# Allegro board SOLAR_21Sept18.brd
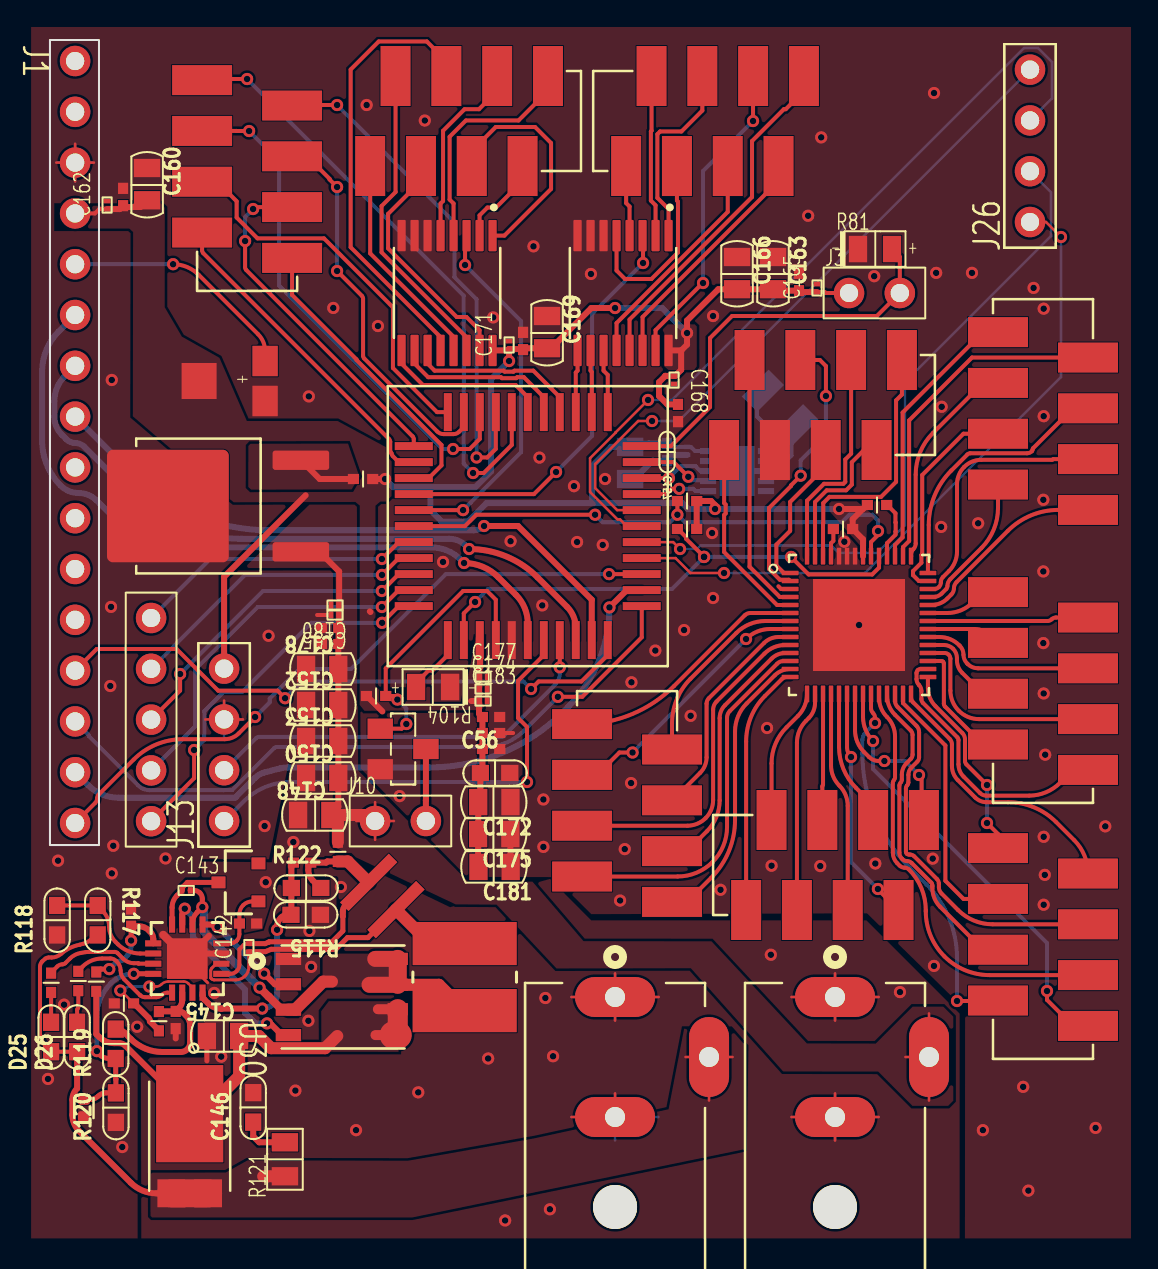
[diagram p0: board, top side]
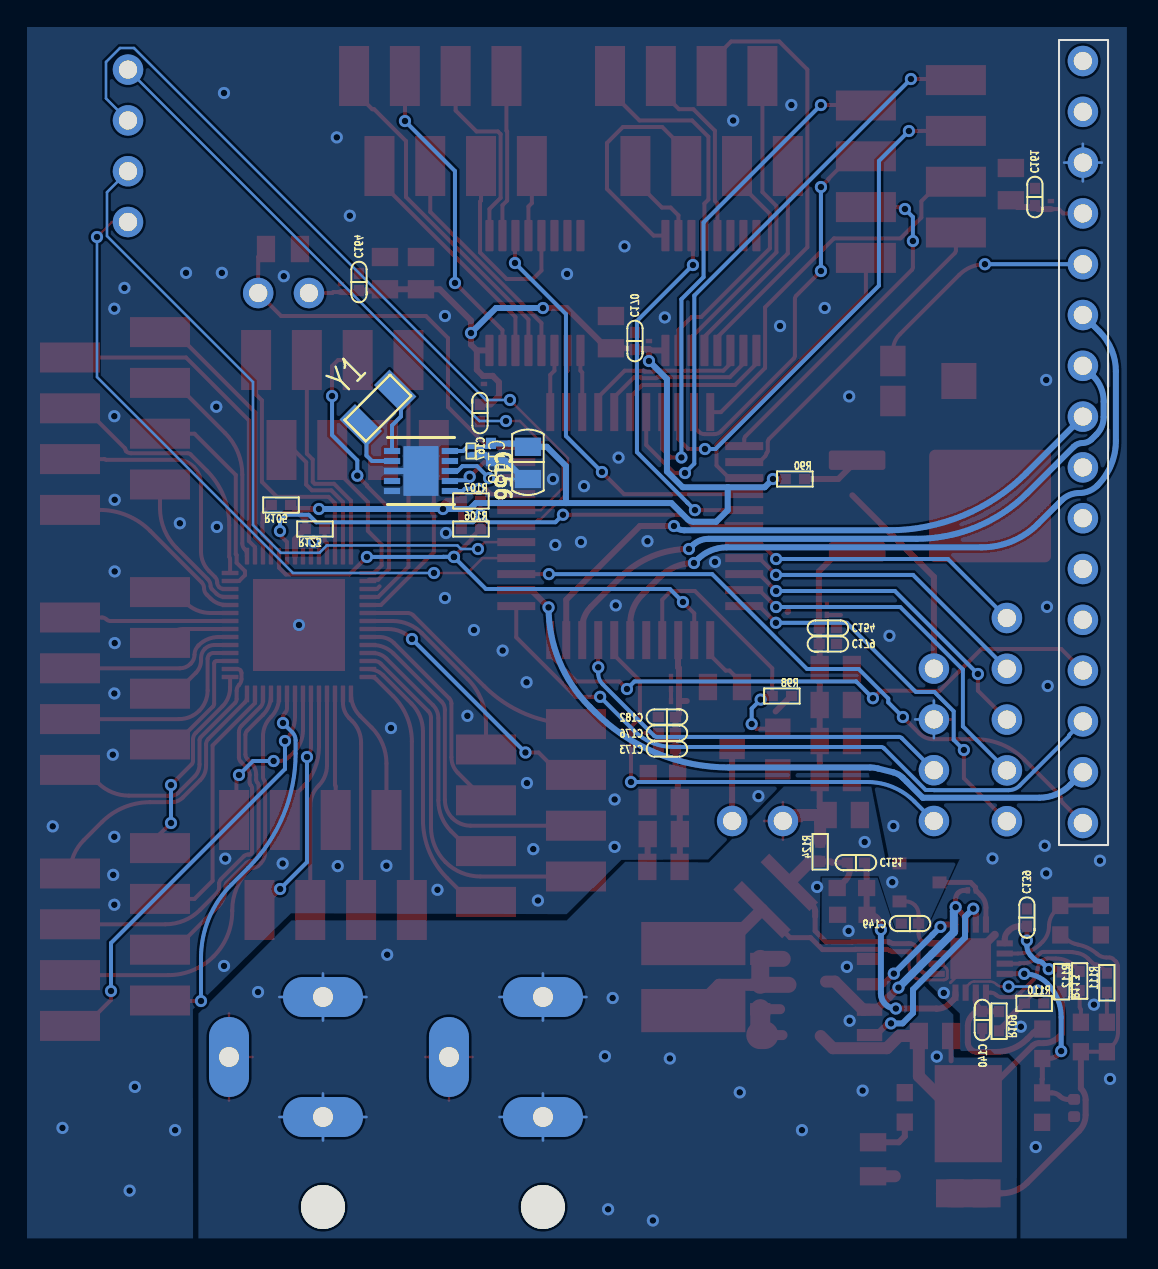
[diagram p1: board, bottom side, seen from below]

Outline 2.45 x 40.25 mm; copper layers: TOP, BOTTOM. Coordinates in mm from the lower left corner of the outline.

## Design rules (mm)
constraint set DEFAULT: min track width 0.127

## Placement (name value [footprint] x y rotation side)
C56  4.7u  [0603G_B]  22.26 3.6 0 top
C139  1u  [0402C_B]  4.06 -3.63 90 top
C140  1u  [0402C_B]  6.29 -8.75 270 top
C142  0.1uF  [0201]  9.95 -5.13 90 top
C143  0.1uF  [0201]  6.81 -2.27 0 top
C145  10u  [0805G]  8.7 -9.55 180 top
C146  2.2uF  [0603G_B]  10.17 -13.12 90 top
C148  4.7uF  [0805G]  13.26 1.5 180 top
C149  1u  [0402C_B]  9.91 -3.92 0 top
C150  10u  [0805G]  13.66 3.35 180 top
C151  4.7uF  [0402C_B]  12.61 -0.88 180 top
C152  10u  [0805G]  13.66 7 180 top
C153  10u  [0805G]  13.66 5.2 180 top
C154  1u  [0402C_B]  14.01 10.85 180 top
C155  0.1uF  [0201]  14.26 11.5 180 top
C156  10u  [0805G]  29.01 19.15 270 bottom
C157  1u  [0402C_B]  30.86 19.65 270 bottom
C158  0.1uF  [0201]  31.86 19.7 270 bottom
C160  10u  [0805G]  4.86 33 90 top
C161  1u  [0402C_B]  3.66 32.4 90 top
C162  0.1uF  [0201]  2.86 32 90 top
C163  10u  [0805G]  36.16 28.55 90 top
C164  1u  [0402C_B]  37.46 28.15 90 top
C165  0.1uF  [0201]  38.36 27.85 90 top
C166  10u  [0805G]  34.36 28.55 90 top
C167  1u  [0402C_B]  31.41 21.6 270 top
C168  0.1uF  [0201]  31.21 23.25 270 top
C169  10u  [0805G]  24.86 25.6 90 top
C170  1u  [0402C_B]  23.66 25.2 90 top
C171  0.1uF  [0201]  22.96 25 90 top
C172  10u  [0805G]  22.18 2.15 0 top
C173  1u  [0402C_B]  22.06 4.8 0 top
C174  0.1uF  [0201]  21.66 7.8 0 top
C175  10u  [0805G]  22.17 0.55 0 top
C176  1u  [0402C_B]  22.06 5.6 0 top
C177  0.1uF  [0201]  21.66 8.4 0 top
C178  10u  [0805G]  13.66 8.8 180 top
C179  1u  [0402C_B]  14.01 10.05 180 top
C180  0.1uF  [0201]  14.26 12 180 top
C181  10u  [0805G]  22.19 -1.09 0 top
C182  1u  [0402C_B]  22.06 6.4 0 top
C183  0.1uF  [0201]  21.66 7.2 0 top
D25  150060GS75000  [0603G_B]  0.06 -9.6 90 top
D26  150060RS75000  [0603G_B]  1.36 -9.6 90 top
D27  BAT54C/SOT  [SOT23-R]  9.43 -1.87 90 top
J1  LCD Conn  [JUMPER16X1]  1.26 39.2 270 top
J2  KEYPAD CONN  [HEADER_8_SMT_254MM]  9.86 33.8 270 top
J3  MagSensor CONN  [JUMPER2]  39.96 27.6 0 top
J6  CON2  [DC_JACK]  40.26 -12.6 270 top
J8  HEADER 8  [HEADER_8_SMT_254MM]  33.26 36.2 180 top
J9  HEADER 5  [JUMPER5]  5.06 11.35 270 top
J10  Fan Conn  [JUMPER2]  16.26 1.2 0 top
J12  HEADER 8  [HEADER_8_SMT_254MM]  20.46 36.2 0 top
J13  HEADER 4  [JUMPER4]  8.71 1.2 90 top
J14  HEADER 8  [HEADER_8_SMT_254MM]  38.16 22 0 top
J15  HEADER 8  [HEADER_8_SMT_254MM]  28.86 1.6 90 top
J16  HEADER 8  [HEADER_8_SMT_254MM]  49.66 21.2 90 top
J17  HEADER 8  [HEADER_8_SMT_254MM]  49.66 8.2 270 top
J18  HEADER 8  [HEADER_8_SMT_254MM]  39.26 -1 180 top
J19  HEADER 8  [HEADER_8_SMT_254MM]  49.66 -4.6 270 top
J24  CON2  [DC_JACK]  29.26 -12.6 270 top
J26  HEADER 4  [JUMPER4]  49.01 31.15 90 top
L1  10uH  [INDM5252X180N]  20.74 -6.6 90 top
Q1  MOSFET N  [SOT23-3A]  17.66 4.8 270 top
Q31  Si7288  [MOSFET_SI7272DP-T1-GE3]  14.66 -7.6 0 top
R80  858-35WR1KLFTR  [VARR]  9.66 23.2 90 top
R81  2.1K  [0805D]  41.26 29.8 0 top
R90  0  [0402R_B]  15.66 18.3 0 top
R98  10K  [0402R_B]  16.31 7.45 0 top
R104  100ohm  [0805D]  19.16 7.9 180 top
R105  1K  [0402R_B]  41.36 17 180 top
R106  1K  [0402R_B]  31.86 15.8 0 top
R107  1K  [0402R_B]  31.86 17.2 0 top
R109  0Ohm  [0402R_B]  5.45 -8.81 90 top
R110  0Ohm  [0402R_B]  3.7 -7.92 0 top
R111  10K  [0402R_B]  0.06 -6.89 270 top
R112  10K  [0402R_B]  1.42 -6.8 270 top
R113  10 Ohm  [0402R_B]  2.32 -6.83 90 top
R115  270k  [0603G_B]  12.79 -3.49 180 top
R116  30 mOhm  [CAPC1632X76N]  16.62 -2.55 315 top
R117  499k  [0603G_B]  2.39 -3.76 270 top
R118  47k  [0603G_B]  0.36 -3.76 90 top
R119  5.23k  [0603G_B]  3.29 -9.94 90 top
R120  30.1k  [0603G_B]  3.3 -13.13 90 top
R121  2 Ohm  [0805R]  11.75 -15.71 90 top
R122  499k  [0603G_B]  12.81 -2.15 0 top
R123  0  [0402R_B]  39.66 15.8 180 top
R124  0Ohm  [0402R_B]  14.4 -0.34 270 top
RT1  THERMISTOR  [CAPC1005X55N]  1.7 -13.15 90 top
U17  PCF85063BTL  [DFN-10_DD]  34.36 18.7 180 bottom
U19  STC15_LQFP44  [LQFP-44]  23.89 15.95 0 top
U20  NCP5501UG  [DPAK229P990X238-3N]  10.41 16.95 90 top
U23  SN74LV4051A-Q1  [SOP65P640X120-16N]  19.86 27.6 270 top
U24  SN74LV4051A-Q1  [SOP65P640X120-16N]  28.66 27.6 270 top
U26  PI4IOE5V96248  [PI4IOE5V96248ZLEX-56N]  40.46 11 0 top
U28  BQ24650  [QFN50P350X350X100-17N]  6.87 -5.68 0 top
U30  PDS1040L  [DIO_SBR10U200P5_13]  6.99 -16.56 270 top
Y1  32.768kHz  [XTAL320X150X90]  36.51 21.85 135 bottom

## Library data of the parts
C56 C139 C140 C145 C149 C150 C152-C154 C156 C157 C160 C161 C163 C164 C166 C167 C169 C170 C172 C173 C175 C176 C178 C179 C181 C182 = CAP
C142 C143 C146 C148 C151 C155 C158 C162 C165 C168 C171 C174 C177 C180 C183 = CAPACITOR NON-POL
D25 D26 = LED
D27 = BAT54C/SOT
J1 = HEADER 16
J2 J8 J12 J14-J19 = HEADER 8
J3 = HEADER 2
J6 J24 = CON2_1
J9 = HEADER 5
J10 = CON2
J13 J26 = HEADER 4
L1 = INDUCTOR
Q1 = MOSFET N_1
Q31 = Si7288_0
R80 = RESISTOR VAR
R81 R104 = RESISTOR
R90 R98 R105-R107 R109-R113 R115-R124 = R
RT1 = THERMISTOR
U17 = PC85063BTL_1
U19 = STC15
U20 = NCP5501UG
U23 U24 = SN74LV4051A-Q1
U26 = PI4IOE5V96248
U28 = BQ24650_3
U30 = PDS1040L_0
Y1 = CRYSTAL

## Footprints (pads in the part's own frame, mm; a bottom-side part is the same pattern mirrored in y, then rotated)
0201
  rect 0.22x0.32 smd: 1(-0.203,0) 2(0.197,0)
0402C_B
  rect 0.559x0.508 smd: 1(-0.432,0) 2(0.432,0)
0402R_B
  rect 0.559x0.508 smd: 1(-0.483,0) 2(0.483,0)
0603G_B
  rect 0.864x0.813 smd: 1(-0.737,0) 2(0.737,0)
0805D
  rect 0.914x1.321 smd: 1(0.85,0) 2(-0.85,0)
0805G
  rect 0.914x1.321 smd: 1(-0.762,0) 2(0.85,0)
0805R
  rect 0.914x1.321 smd: 1(-0.85,0) 2(0.85,0)
CAPC1005X55N
  custom 0.54x0.6 smd: 1(-0.43,0) 2(0.43,0)
CAPC1632X76N
  rect 0.61x3.454 smd: 1(-0.965,0) 2(0.965,0)
DC_JACK
  round 2.2 hole 2.2 unplated: (5.5,-1)
  oval 2x4 hole 1: 1(-5,-1) 2(1,-1)
  oval 4x2 hole 1: 3(-2,3.7)
DFN-10_DD
  rect 0.813x0.305 smd: 1(-1.448,1) 2(-1.448,0.5) 3(-1.448,0) 4(-1.448,-0.5) 5(-1.448,-1) 6(1.448,-1) 7(1.448,-0.5) 8(1.448,0) 9(1.448,0.5) 10(1.448,1)
  rect 1.753x2.489 smd: 11(0,0)
DIO_SBR10U200P5_13
  rect 1.4x1.39 smd: 1(0.856,0.92) 2(0.856,-0.92)
  rect 4.86x3.36 smd: 3(-3.126,0)
DPAK229P990X238-3N
  custom 0.97x2.83 smd: 1(-2.29,-2.14) 3(2.29,-2.14)
  custom 5.63x6.09 smd: 4(0,4.51)
HEADER_8_SMT_254MM
  rect 1.5x3 smd: 1(-4.445,-2.25) 2(-3.175,2.25) 3(-1.905,-2.25) 4(-0.635,2.25) 5(0.635,-2.25) 6(1.905,2.25) 7(3.175,-2.25) 8(4.445,2.25)
INDM5252X180N
  rect 2.159x5.207 smd: 1(-1.676,0) 2(1.676,0)
JUMPER2
  round 1.524 hole 0.914: 1(0,0) 2(2.54,0)
JUMPER4
  round 1.524 hole 0.914: 1(0,0) 2(2.54,0) 3(5.08,0) 4(7.62,0)
JUMPER5
  round 1.524 hole 0.914: 1(0,0) 2(2.54,0) 3(5.08,0) 4(7.62,0) 5(10.16,0)
JUMPER16X1
  round 1.524 hole 0.914: 1(0,0) 2(2.54,0) 3(5.08,0) 4(7.62,0) 5(10.16,0) 6(12.7,0) 7(15.24,0) 8(17.78,0) 9(20.32,0) 10(22.86,0) 11(25.4,0) 12(27.94,0) 13(30.48,0) 14(33.02,0) 15(35.56,0) 16(38.1,0)
LQFP-44
  rect 1.9x0.4 smd: 1(-5.7,4) 2(-5.7,3.2) 3(-5.7,2.4) 4(-5.7,1.6) 5(-5.7,0.8) 6(-5.7,0) 7(-5.7,-0.8) 8(-5.7,-1.6) 9(-5.7,-2.4) 10(-5.7,-3.2) 11(-5.7,-4) 23(5.7,-4) 24(5.7,-3.2) 25(5.7,-2.4) 26(5.7,-1.6) 27(5.7,-0.8) 28(5.7,0) 29(5.7,0.8) 30(5.7,1.6) 31(5.7,2.4) 32(5.7,3.2) 33(5.7,4)
  rect 0.4x1.9 smd: 12(-4,-5.7) 13(-3.2,-5.7) 14(-2.4,-5.7) 15(-1.6,-5.7) 16(-0.8,-5.7) 17(0,-5.7) 18(0.8,-5.7) 19(1.6,-5.7) 20(2.4,-5.7) 21(3.2,-5.7) 22(4,-5.7) 34(4,5.7) 35(3.2,5.7) 36(2.4,5.7) 37(1.6,5.7) 38(0.8,5.7) 39(0,5.7) 40(-0.8,5.7) 41(-1.6,5.7) 42(-2.4,5.7) 43(-3.2,5.7) 44(-4,5.7)
MOSFET_SI7272DP-T1-GE3
  rect 1.27x0.61 smd: 1(-2.732,1.905) 2(-2.732,0.635) 3(-2.732,-0.635) 4(-2.732,-1.905)
  rect 1.02x0.61 smd: 5(2.732,-1.905) 6(2.732,-0.61) 7(2.732,0.61) 8(2.732,1.905)
PI4IOE5V96248ZLEX-56N
  custom 0.84x0.22 smd: 1(-3.445,2.6) 2(-3.445,2.2) 3(-3.445,1.8) 4(-3.445,1.4) 5(-3.445,1) 6(-3.445,0.6) 7(-3.445,0.2) 8(-3.445,-0.2) 9(-3.445,-0.6) 10(-3.445,-1) 11(-3.445,-1.4) 12(-3.445,-1.8) 13(-3.445,-2.2) 14(-3.445,-2.6) 29(3.445,-2.6) 30(3.445,-2.2) 31(3.445,-1.8) 32(3.445,-1.4) 33(3.445,-1) 34(3.445,-0.6) 35(3.445,-0.2) 36(3.445,0.2) 37(3.445,0.6) 38(3.445,1) 39(3.445,1.4) 40(3.445,1.8) 41(3.445,2.2) 42(3.445,2.6)
  custom 0.22x0.84 smd: 15(-2.6,-3.445) 16(-2.2,-3.445) 17(-1.8,-3.445) 18(-1.4,-3.445) 19(-1,-3.445) 20(-0.6,-3.445) 21(-0.2,-3.445) 22(0.2,-3.445) 23(0.6,-3.445) 24(1,-3.445) 25(1.4,-3.445) 26(1.8,-3.445) 27(2.2,-3.445) 28(2.6,-3.445) 43(2.6,3.445) 44(2.2,3.445) 45(1.8,3.445) 46(1.4,3.445) 47(1,3.445) 48(0.6,3.445) 49(0.2,3.445) 50(-0.2,3.445) 51(-0.6,3.445) 52(-1,3.445) 53(-1.4,3.445) 54(-1.8,3.445) 55(-2.2,3.445) 56(-2.6,3.445)
  rect 4.6x4.6 smd: 57(0,0)
QFN50P350X350X100-17N
  rect 0.813x0.305 smd: 1(-1.702,0.762) 2(-1.702,0.254) 3(-1.702,-0.254) 4(-1.702,-0.762) 9(1.702,-0.762) 10(1.702,-0.254) 11(1.702,0.254) 12(1.702,0.762)
  rect 0.305x0.813 smd: 5(-0.762,-1.702) 6(-0.254,-1.702) 7(0.254,-1.702) 8(0.762,-1.702) 13(0.762,1.702) 14(0.254,1.702) 15(-0.254,1.702) 16(-0.762,1.702)
  rect 2.032x2.032 smd: 17(0,0)
SOP65P640X120-16N
  custom 1.57x0.41 smd: 1(-2.87,2.275) 2(-2.87,1.625) 3(-2.87,0.975) 4(-2.87,0.325) 5(-2.87,-0.325) 6(-2.87,-0.975) 7(-2.87,-1.625) 8(-2.87,-2.275) 9(2.87,-2.275) 10(2.87,-1.625) 11(2.87,-0.975) 12(2.87,-0.325) 13(2.87,0.325) 14(2.87,0.975) 15(2.87,1.625) 16(2.87,2.275)
SOT23-3A
  rect 1.016x1.27 smd: 1(-1.016,-1.143) 2(1.016,-1.143) 3(0,1.143)
SOT23-R
  rect 0.6x0.7 smd: 1(-0.95,-1) 2(0.95,-1) 3(0,1)
VARR
  rect 1.524x1.27 smd: 1(-1,-1.1) 2(1,-1.1)
  rect 1.803x1.753 smd: 3(0,2.2)
XTAL320X150X90
  rect 1.092x1.905 smd: 1(-1.219,0) 2(1.219,0)

## Nets
VCC: C56.1 C156.1 C157.1 C158.1 C160.1 C161.1 C162.1 C163.1 C164.1 C165.1 C166.1 C167.1 C168.1 C169.1 C170.1 C171.1 C172.1 C173.1 C174.1 C175.1 C176.1 C177.1 C181.1 C182.1 C183.1 J1.4 J3.1 J13.4 R80.3 R90.2 R98.1 R105.2 R106.2 R107.2 R123.1 U17.10 U19.14 U23.16 U24.16 U26.49
VIN_SOLAR: D25.1 D26.1 J24.3 R117.2 R121.1 U30.1 U30.2
0: C56.2 C139.2 C140.2 C145.2 C146.2 C148.2 C149.2 C150.2 C152.2 C153.2 C154.2 C155.2 C156.2 C157.2 C158.2 C160.2 C161.2 C162.2 C163.2 C164.2 C165.2 C166.2 C167.2 C168.2 C169.2 C170.2 C171.2 C172.2 C173.2 C174.2 C175.2 C176.2 C177.2 C178.2 C179.2 C180.2 C181.2 C182.2 C183.2 J1.3 J6.1 J6.2 J13.3 J14.3 J24.1 J24.2 Q1.2(SOURCE) Q31.1 R80.1 R81.2 R104.2 R110.1 R115.1 R118.1 R120.1 RT1.1 U17.3 U17.5(VSS) U17.11 U19.16 U20.4 U23.6 U23.7 U23.8 U24.6 U24.7 U24.8 U26.50 U26.51 U26.52 U26.57 U28.11 U28.17
ADC0: U19.4 U24.3
ADC0_A: U19.34 U24.11
ADC0_B: U19.35 U24.10
ADC0_C: U19.36 U24.9
ADC0_I0: J8.1 U24.13
ADC0_I1: J8.2 U24.14
ADC0_I2: J8.3 U24.15
ADC0_I3: J8.4 U24.12
ADC0_I4: J8.5 U24.1
ADC0_I5: J8.6 U24.5
ADC0_I6: J8.7 U24.2
ADC0_I7: J8.8 U24.4(Y7)
ADC0_I8: J12.1 U23.13
ADC0_I9: J12.2 U23.14
ADC0_I10: J12.3 U23.15
ADC0_I11: J12.4 U23.12
ADC0_I12: J12.5 U23.1
ADC0_I13: J12.6 U23.5
ADC0_I14: J12.7 U23.2
ADC0_I15: J12.8 U23.4(Y7)
ADC1: U19.5 U23.3
ADC1_A: U19.37 U23.11
ADC1_B: U19.38 U23.10
ADC1_C: U19.39 U23.9
ADC2: J9.1 U19.7
ADC3: J9.2 U19.8
ADC4: J9.3 U19.9
ADC5: J9.4 U19.10
ADC6: J9.5 U19.11(XTAL2/RXD_3/ADC6/P1.6)
FAN+V: J10.2 Q1.3
KP1: J2.1 U19.40
KP2: J2.2 U19.41
KP3: J2.3 U19.42
KP4: J2.4 U19.43
KP5: J2.5 U19.44
KP6: J2.6 U19.1
KP7: J2.7 U19.2
KP8: J2.8 U19.3
LCD_CONTRAST: J1.5 R80.2(WIPER)
LCD_D5: J1.13 U19.22
LCD_D6: J1.14 U19.23
LCD_D7: J1.15 U19.24
LCD_D8: J1.16 U19.25
LCD_EN: J1.8 U19.21
LCD_RS: J1.6 U19.17
LCD_RW: J1.7 U19.20
LD_GRN_CHRG: D25.2(CATHODE) R111.2
LD_RD_CHRG: D26.2(CATHODE) R112.2
P5.5_FANCTRL: Q1.1 R98.2 U19.15
P23_MAGSENSOR: J3.2 R81.1 U19.33
PCF85063BTL_CE: U17.6 U19.30
PCF85063BTL_SCL: U17.7 U19.32
PCF85063BTL_SDIO: U17.8 U19.31
RTC_XTAL1: U17.1 Y1.2
RTC_XTAL2: U17.2 Y1.1
STAT1: R111.1 U28.3
STAT2: R112.1 U28.5
STC_IOEXPDR_SCL: R106.1 U19.13 U26.47
STC_IOEXPDR_SDA: R107.1 U19.6 U26.48
STC_RXD: J13.1 U19.18
STC_TXD: J13.2 U19.19
TEMPERATURE: R104.1 U19.12
V_5V_BEFORE_R: R90.1 U20.3(VOUT)
VMAIN_6V: C148.1 C150.1 C152.1 C153.1 C154.1 C155.1 C178.1 C179.1 C180.1 J6.3 J10.1 R124.1 U20.1
N5281104: R105.1 U26.46
N5281708: J16.1 U26.38
N5281710: J16.2 U26.39
N5281712: J16.3 U26.40
N5281714: J16.4 U26.41
N5281716: J16.5 U26.42
N5281718: J16.6 U26.43
N5281720: J16.7 U26.44
N5281722: J16.8 U26.45(IO5_7)
N5281756: J14.1 U26.5
N5281758: J14.2 U26.4
N5281760: U26.3
N5281762: J14.4 U26.2
N5281764: J14.5 U26.1
N5281766: J14.6 U26.56
N5281768: J14.7 U26.55
N5281770: J14.8 U26.54
N5281960: J15.1 U26.13
N5281966: J15.2 U26.12
N5281972: J15.3 U26.11
N5281978: J15.4 U26.10
N5281984: J15.5 U26.9
N5281990: J15.6 U26.8
N5281996: J15.7 U26.7
N5282002: J15.8 U26.6
N5282607: J17.1 U26.37
N5282609: J17.2 U26.36
N5282611: J17.3 U26.35
N5282613: J17.4 U26.34
N5282615: J17.5 U26.33
N5282617: J17.6 U26.32
N5282619: J17.7 U26.31
N5282621: J17.8 U26.30
N5282705: J18.1 U26.21
N5282707: J18.2 U26.20
N5282709: J18.3 U26.19
N5282711: J18.4 U26.18
N5282713: J18.5 U26.17
N5282715: J18.6 U26.16
N5282717: J18.7 U26.15
N5282719: J18.8 U26.14
N5282803: J19.1 U26.29
N5282805: J19.2 U26.28
N5282807: J19.3 U26.27
N5282809: J19.4 U26.26
N5282811: J19.5 U26.25
N5282813: J19.6 U26.24
N5282815: J19.7 U26.23
N5282817: J19.8 U26.22
N5297541: C140.1 R109.2 R119.2 U28.6(VREF)
N5297885: C143.1 D27.3 U28.16
N5297889: C143.2 L1.1 Q31.3(S2) Q31.7 Q31.8 U28.14
N5298100: R109.1 R110.2 U28.7
N5300450: C149.1 D27.1 U28.12
N5300470: C142.1 L1.2 R116.2 U28.10
N5300474: C142.2 C151.1 R116.1 R122.2 R124.2 U28.9
N5300499: Q31.2 U28.13
N5300503: Q31.4 U28.15
N5300584: C151.2 R115.2 R122.1 U28.8
N5302120: C139.1 R113.2 U28.1
N5302799: C145.1 Q31.5 Q31.6 R113.1 U30.3
N5307205: R117.1 R118.2 U28.2
N5307428: R119.1 R120.2 RT1.2 U28.4
N5310551: C146.1 R121.2
N5327580: R123.2 U26.53
N5329171: J26.1 U19.26
N5329180: J26.2 U19.27
N5329189: J26.3 U19.28
N5329196: J26.4 U19.29

Pads without a net: D27 2; J1 1 2 9 10 11 12; U17 4 9

## Via types
v1: diameter 0.61, hole 0.33, TOP to BOTTOM, 181 vias

## Routing (per net, layer and track width the routed paths; a pad name or vN(x,y) marks a point on that pad's centre or on a via; arc(x,y) is an arc through that point)
VCC: length 104.1
  TOP w0.2: J1.4 2.25,31.58 2.46,31.8 C162.1 ; C165.1 38.75,27.65 38.79,27.6 v1(39.96,27.6)
  TOP w0.3: C181.1 21.41,-1.08 C175.1 21.42,0.56 C172.1 21.52,2.26 C56.1 21.63,3.71 C173.1 C176.1 C182.1 21.46,6.57 C183.1 ; C167.1 30.88,22.03 30.46,22.45 30.46,23.14 30.77,23.46 ; R105.2 40.85,17 40.65,16.8 ; C171.1 22.89,24.73 U23.16 ; C171.1 v1(22.96,24.2) ; C171.1 23.63,24.8 C170.1 23.73,24.84 C169.1 25.06,24.84 27.07,26.85 v1(28.26,26.85) ; C162.1 3.49,31.8 C161.1 3.73,31.9 4.52,31.9 C160.1 ; 21.07,7.2 C183.1 ; C183.1 C174.1 C177.1 21.46,8.84 21.5,8.89 21.5,10.24 21.49,10.25 ; 31.56,24.73 U24.16 ; 31.56,24.73 31.57,24.73 31.86,25.02 v1(31.86,25.6) 31.86,26.23 33.42,27.79 C166.1 C163.1 36.23,27.72 C164.1 37.53,27.65 C165.1 ; 31.56,24.73 31.56,23.76 31.26,23.46 C168.1 31.21,23.46 30.77,23.46 ; 30.77,23.46 30.77,23.47 ; 40.65,16.8 40.14,16.29 R123.1 40.66,15.29 U26.49 ; 40.65,16.8 v1(39.46,16.8) ; 12.79,17.49 8.71,13.41 J13.4 ; v1(33.26,16.8) 33.26,17 33.06,17.2 R107.2 R106.2 ; R98.1 15.85,7.45 16.62,6.68 ; 16.03,11.65 16,11.68 ; R90.2 v1(16.76,18.3)
  BOTTOM w0.2: U17.10 32.25,19.7 32.05,19.91 C158.1 31.04,19.91 C157.1
  BOTTOM w0.3: v1(16.76,18.3) 17.17,17.89 19.02,17.89 ; 27.11,17.1 27.11,18.95 28.07,19.92 C156.1 29.17,20.07 29.95,20.07 29.96,20.08 C157.1 ; 27.11,17.1 31.62,17.1 31.91,16.8 v1(33.26,16.8) v1(39.46,16.8) ; 27.11,17.1 21.83,17.1 21.02,16.28 arc(20.89,16.2) 20.74,16.17 19.6,16.17 19.02,16.74 19.02,17.89 ; 19.02,17.89 21.27,17.89 22.06,18.68 22.06,23.3 v1(22.96,24.2) ; v1(31.86,25.6) 30.61,26.85 v1(28.26,26.85)
VIN_SOLAR: length 26.6
  TOP w0.127: 32.96,-12.77 J24.3 ; J24.3 31.78,-10.6 ; J24.3 34.14,-10.6
  TOP w0.2: D26.1 D25.1 0.06,-10.31 -0.22,-10.03 arc(-0.43,-9.72) -0.5,-9.36 -0.5,-6.09 arc(-0.47,-5.94) -0.39,-5.82 arc(-0.31,-5.75) -0.23,-5.68 arc(-0.16,-5.64) -0.08,-5.62 0.08,-5.62 arc(0.32,-5.58) 0.53,-5.46 0.58,-5.42 arc(1.01,-5.14) 1.49,-4.98 1.65,-4.94 arc(1.89,-4.84) 2.09,-4.69 2.21,-4.57 arc(2.29,-4.51) R117.2
  TOP w0.3: U30.2 5.32,-17.41 arc(4.63,-17.28) 4.04,-16.88 1.46,-14.3 arc(1.21,-13.93) 1.12,-13.49 1.12,-12.74 arc(1.18,-12.43) 1.36,-12.17 D26.1
  TOP w0.6: 10.66,-16.56 R121.1
  TOP w1.4: U30.1 U30.2
0: length 81
  TOP w0.127: 7.77,6.28 J13.3 ; J13.3 8.71,7.22 ; J13.3 9.65,6.28 ; U28.11 8.57,-5.42 ; J6.1 41.44,-7.6 ; J6.1 39.26,-8.77 ; J6.1 37.08,-7.6 ; J6.1 39.26,-6.42 ; J6.2 41.44,-13.6 ; J6.2 37.08,-13.6 ; J6.2 39.26,-12.42 ; J6.2 39.26,-14.77 ; J24.1 28.26,-6.42 ; J24.1 28.26,-8.77 ; J24.1 26.08,-7.6 ; J24.1 30.44,-7.6 ; 26.08,-13.6 J24.2 28.26,-12.42 ; 0.32,34.12 J1.3 ; J1.3 1.26,35.06 ; J1.3 1.26,33.18 ; J1.3 2.2,34.12
  TOP w0.15: U28.17 6.87,-5.86 7.88,-6.88
  TOP w0.2: C155.2 13.36,11.5 ; C176.2 23.16,5.6 ; C174.2 C183.2
  TOP w0.25: C145.2 7.85,-10.79
  TOP w0.3: C181.2 23.02,-1.08 C175.2 ; U28.17 6.87,-5.62 7.96,-4.53 ; U28.11 7.15,-5.42 6.9,-5.68 ; C140.2 6.29,-9.67
  TOP w0.4: 6.9,-5.68 U28.17 6.86,-5.68 5.66,-4.48
  BOTTOM w0.127: J24.1 30.44,-7.6 ; J24.1 28.26,-8.77 ; J24.1 26.08,-7.6 ; J24.1 28.26,-6.42 ; 1.26,33.18 J1.3 ; J1.3 2.2,34.12 ; J1.3 1.26,35.06 ; J1.3 0.32,34.12 ; 26.08,-13.6 J24.2 ; J24.2 30.44,-13.6 ; J24.2 28.26,-14.77 ; J24.2 28.26,-12.42 ; 37.08,-7.6 J6.1 ; J6.1 39.26,-8.77 ; J6.1 41.44,-7.6 ; J6.1 39.26,-6.42 ; 39.26,-14.77 J6.2 ; J6.2 41.44,-13.6 ; J6.2 37.08,-13.6 ; J6.2 39.26,-12.42 ; 8.71,5.34 J13.3 ; J13.3 9.65,6.28 ; J13.3 8.71,7.22 ; 29.85,18.3 29.21,18.3
  BOTTOM w0.3: U17.3 U17.11 ; C156.2 29.21,18.3 30.13,19.22 C157.2 31.14,19.51 C158.2
  vias: v1(-0.1,-11.69) v1(0.41,-0.78) v1(0.71,-7.98) v1(3.09,23.26) v1(3.06,11.91) v1(3.02,7.95) v1(3.09,-1.42) v1(3.17,-0.03) v1(3.62,-15.1) v1(4.36,-9.08) v1(5.78,-0.67) v1(8.22,-7.39) v1(8.57,-10.58) v1(10.74,0.95) v1(10.79,-1.86) v1(10.93,10.46) v1(12.17,0.15) v1(12.27,-12.28) v1(12.95,22.43) v1(12.98,-4.29) v1(12.92,-8.78) v1(13.06,-6.09) v1(14.17,26.86) v1(14.55,-2.1) v1(15.31,-14.25) v1(15.84,37) v1(16.4,25.95) v1(17.49,2.45) v1(18.42,-12.36) v1(18.75,36.23) v1(19.66,14.16) v1(21.91,-10.67) v1(22.17,26.38) v1(22.76,-18.77) v1(23.03,15.19) v1(24.18,29.94) v1(24.48,19.37) v1(24.62,11.98) v1(24.68,2.28) v1(24.68,-0.09) v1(24.77,-7.65) v1(25,-18.21) v1(25.16,-10.56) v1(26.21,17.95) v1(26.36,15.15) v1(27.05,28.56) v1(27.64,15.01) v1(27.76,18.3) v1(28.51,-2.77) v1(28.74,-0.2) v1(29.08,8.14) v1(29.06,3.1) v1(30.27,9.73) v1(31.71,10.75) v1(32.04,6.46) v1(33.16,26.45) v1(33.11,15.6) v1(33.16,12.35) v1(33.53,-2.24) v1(35.86,5.85) v1(36.09,-1.03) v1(36.05,-5.48) v1(37.92,31.47) v1(38.57,35.39) v1(38.52,-1.05) v1(39.73,15.17) v1(40.46,11) v1(41.22,28.44) v1(41.27,-0.92) v1(42.51,-7.35) v1(44.14,-0.68) v1(44.21,-6.04) v1(44.21,37.6) v1(44.32,28.61) v1(44.59,21.92) v1(44.57,15.91) v1(46.11,28.61) v1(46.42,16.09) v1(46.65,-14.25) v1(48.67,-12.09) v1(48.93,-17.28) v1(49.19,27.86) v1(49.69,26.82) v1(49.69,21.44) v1(49.68,17.26) v1(49.68,13.68) v1(49.68,10.1) v1(49.69,7.58) v1(49.69,0.41) v1(49.69,-2.98) v1(49.77,4.52) v1(49.75,-1.49) v1(52.29,-14.14) v1(52.77,0.94)
ADC0: length 21.2
  TOP w0.2: v1(25.31,18.65) 24.2,17.55 U19.4 ; U24.3 29.66,30.45 v1(29.66,29.1)
  BOTTOM w0.2: v1(25.31,18.65) 27.11,20.45 27.11,26.55 v1(29.66,29.1)
ADC0_A: length 3.2
  TOP w0.2: U24.11 27.68,23.72 27.89,23.51 U19.34
ADC0_B: length 3.1
  TOP w0.2: U24.10 27.03,23.72 27.09,23.66 U19.35
ADC0_C: length 3.1
  TOP w0.2: U24.9 26.38,23.72 26.29,23.63 U19.36
ADC0_I0: length 17.4
  TOP w0.2: U24.13 28.98,26.28 35.11,32.4 35.11,35.2 36.7,36.79 36.79,36.79 37.7,37.7 J8.1
ADC0_I1: length 12
  TOP w0.2: U24.14 29.63,26.4 36.43,33.2 J8.2
ADC0_I2: length 15.8
  TOP w0.2: J8.3 35.16,38.45 v1(35.16,36.2) ; U24.15 30.28,25.75 32.66,28.12 v1(32.66,28.1)
  BOTTOM w0.2: v1(35.16,36.2) 32.66,33.7 v1(32.66,28.1)
ADC0_I3: length 11.5
  TOP w0.2: 33.89,33.95 33.89,31.66 28.33,26.1 U24.12
ADC0_I4: length 9.8
  TOP w0.2: U24.1 30.93,31.8 30.38,32.36 30.38,35.55 30.51,35.68 31.58,35.68 32.62,36.73 J8.5
ADC0_I5: length 9.9
  TOP w0.2: U24.5 28.33,28.73 28.76,28.3 30.08,28.3 31.41,29.63 31.41,32.18 31.35,32.23 J8.6
ADC0_I6: length 8.1
  TOP w0.2: U24.2 30.28,31.99 30.05,32.22 30.05,35.68 30.08,35.72 J8.7
ADC0_I7: length 3.6
  TOP w0.2: U24.4 28.98,31.93 28.81,32.1 J8.8
ADC0_I8: length 10.9
  TOP w0.2: J12.1 16.01,29.59 20.18,25.42 U23.13
ADC0_I9: length 15.8
  TOP w0.2: J12.2 17.28,32.65 16.58,31.95 16.58,29.64 20.83,25.39 U23.14
ADC0_I10: length 12.1
  TOP w0.2: U23.15 21.48,25.75 20.83,26.4 20.34,26.4 16.91,29.84 16.91,31.56 18.55,33.2 J12.3
ADC0_I11: length 22.4
  TOP w0.2: U23.12 19.53,25.39 15.04,29.89 15.04,38.78 16.44,40.18 18.85,40.18 19.82,39.2 19.82,38.45
ADC0_I12: length 11.7
  TOP w0.2: U23.1 22.73,30.47 25.06,32.81 25.06,35.1 24.26,35.9 22.29,35.9 21.09,34.7 J12.5
ADC0_I13: length 9.6
  TOP w0.2: J12.6 22.36,37.7 21.45,36.79 20.73,36.79 19.66,35.72 19.66,32.2 19.53,32.08 U23.5
ADC0_I14: length 4.6
  TOP w0.2: U23.2 21.48,31.49 21.88,31.88 22.31,31.88 23.63,33.2 J12.7
ADC0_I15: length 11.6
  TOP w0.2: U23.4 20.18,32.08 19.99,32.28 19.99,35.42 20.8,36.23 23.43,36.23 24.9,37.7 J12.8
ADC1: length 18.6
  TOP w0.2: U23.3 20.76,30.4 v1(20.76,29) ; v1(20.66,16.75) U19.5
  BOTTOM w0.2: v1(20.66,16.75) 21.04,17.12 21.04,17.12 23.56,19.65 23.56,26.2 v1(20.76,29)
ADC1_A: length 8.8
  TOP w0.2: U19.37 25.49,22.4 24.17,23.72 23.23,23.72 23.18,23.67 22.74,23.67 22.69,23.72 19.23,23.72 18.88,24.07 U23.11
ADC1_B: length 8.6
  TOP w0.2: U23.10 18.23,24.07 18.91,23.39 22.55,23.39 22.6,23.34 23.31,23.34 23.36,23.39 23.7,23.39 24.69,22.4 U19.38
ADC1_C: length 8.4
  TOP w0.2: U19.39 23.89,22.4 23.29,23 18.65,23 17.58,24.07 U23.9
ADC2: length 14.7
  TOP w0.2: v1(16.6,14.3) 17.44,15.15 U19.7
  BOTTOM w0.2: v1(16.6,14.3) 8.01,14.3 J9.1
ADC3: length 15.4
  TOP w0.2: U19.8 17.44,14.35 v1(16.6,13.51)
  BOTTOM w0.2: v1(16.6,13.51) 9.75,13.51 J9.2
ADC4: length 16.6
  TOP w0.2: v1(16.6,12.7) 17.44,13.55 U19.9 ; v1(6.51,8.55) 6.51,7.72 J9.3
  BOTTOM w0.2: v1(16.6,12.7) 10.66,12.7 v1(6.51,8.55)
ADC5: length 18.5
  TOP w0.2: U19.10 17.44,12.75 v1(16.6,11.9)
  BOTTOM w0.2: J9.4 7.26,5.93 7.26,8.77 10.39,11.9 v1(16.6,11.9)
ADC6: length 19.3
  TOP w0.2: J9.5 7.21,3.34 v1(7.21,4.75) ; U19.11 17.44,11.95 v1(16.61,11.11)
  BOTTOM w0.2: v1(7.21,4.75) 7.72,5.26 7.72,6.69 8.68,7.65 9.61,7.65 13.07,11.11 v1(16.61,11.11)
FAN+V: length 3.6
  TOP w0.3: Q1.3 18.8,2.25 18.8,2.24 J10.2
KP1: length 30.8
  TOP w0.2: v1(21.16,18.6) 21.69,18.6 23.09,20.01 U19.40 ; J2.1 7.66,38.3 v1(9.86,38.3)
  BOTTOM w0.2: v1(9.86,38.3) 20.69,27.47 20.69,19.07 v1(21.16,18.6)
KP2: length 25.8
  TOP w0.2: U19.41 22.29,19.81 21.87,19.38 v1(21.34,19.38) ; J2.2 12.13,37 v1(14.36,37)
  BOTTOM w0.2: v1(21.34,19.38) 21.34,27.29 20.23,28.4 20.23,31.13 v1(14.36,37)
KP3: length 25.7
  TOP w0.2: J2.3 9.34,35.71 9.34,35.7 v1(9.96,35.7) ; U19.42 21.49,20.31 20.99,19.8 v1(20.16,19.8)
  BOTTOM w0.2: v1(20.16,19.8) 19.63,19.8 11.46,27.97 11.46,34.2 v1(9.96,35.7)
KP4: length 19.4
  TOP w0.2: v1(14.36,32.9) 13.98,33.28 13.98,33.31 12.86,34.44 J2.4 ; U19.43 20.69,20.98 arc(20.68,20.9) 20.64,20.84 20.46,20.66 arc(20.33,20.58) 20.18,20.55 19.68,20.55 arc(19.51,20.58) 19.37,20.68 15.72,24.33 arc(15.67,24.39) 15.66,24.47 15.66,27.31 arc(15.64,27.4) 15.59,27.47 v1(14.36,28.7)
  BOTTOM w0.2: v1(14.36,28.7) v1(14.36,32.9)
KP5: length 19.3
  TOP w0.2: 7.61,33.17 8.36,33.17 9.34,32.19 9.34,31.38 10.38,30.34 13.7,30.34 17.15,26.89 17.15,23.85 19.36,21.65 U19.44
KP6: length 17.5
  TOP w0.2: J2.6 10.25,31.9 v1(10.16,31.8) ; v1(9.76,30.2) 9.76,28.89 arc(9.77,28.82) 9.82,28.75 18.14,20.43 arc(18.18,20.37) 18.19,20.29 U19.1
  BOTTOM w0.2: v1(10.16,31.8) 9.76,31.4 v1(9.76,30.2)
KP7: length 16.3
  TOP w0.2: U19.2 17.57,19.15 arc(17.45,19.17) 17.35,19.24 17.14,19.45 arc(17.1,19.51) 17.08,19.59 17.05,19.62 arc(17.03,19.66) 17.02,19.7 17.02,20.16 arc(17,20.24) 16.96,20.3 7.67,29.59 arc(7.62,29.66) 7.61,29.73 J2.7
KP8: length 15.1
  TOP w0.2: 12.11,29.36 12.11,27.5 15.33,24.28 15.33,24.25 19.58,20 19.58,18.98 18.94,18.35 U19.3
LCD_CONTRAST: length 12
  TOP w0.2: R80.2 10.76,24.7 arc(10.67,25.15) 10.41,25.54 7.44,28.51 arc(6.85,28.91) v1(6.16,29.04)
  BOTTOM w0.2: v1(6.16,29.04) J1.5
LCD_D5: length 30.1
  TOP w0.2: 27.89,10.25 27.89,9.5 26.58,8.18 24.44,8.18 v1(24.06,7.8) ; v1(11.76,7.34) 11.38,7.72 8.41,7.72 6.33,9.8 2.34,9.8 J1.13
  BOTTOM w0.2: v1(11.76,7.34) 12.6,8.18 23.68,8.18 v1(24.06,7.8)
LCD_D6: length 34.3
  TOP w0.2: v1(25.4,7.41) 26.62,7.41 29.59,10.39 U19.23
  BOTTOM w0.2: v1(25.4,7.41) 23.7,5.71 arc(22.8,5.11) 21.74,4.9 11.35,4.9 arc(11.27,4.89) 11.21,4.84 9.12,2.75 8.76,2.75 8.7,2.74 4.98,2.74 arc(4.67,2.8) 4.42,2.98 1.96,5.43 arc(1.95,5.48) 1.92,5.52 J1.14
LCD_D7: length 34
  TOP w0.3: U19.24 28.84,12.75 v1(27.98,11.88)
  BOTTOM w0.3: J1.15 1.9,3.01 arc(2.6,2.53) 3.44,2.37 9.25,2.37 9.28,2.38 10.07,3.17 10.27,3.37 arc(10.48,3.53) 10.73,3.63 11.51,3.83 arc(11.7,3.87) 11.89,3.88 18.97,3.88 arc(22.59,4.6) 25.66,6.65 25.92,6.92 arc(27.44,9.19) v1(27.98,11.88)
LCD_D8: length 33.5
  TOP w0.2: J1.16 2.27,2.11 arc(2.33,2.21) 2.35,2.32 arc(2.38,2.43) 2.44,2.53 4.19,4.28 arc(5.32,5.03) 6.64,5.29 8.74,5.29 arc(9.12,5.37) 9.44,5.58 v1(10.26,6.4) ; v1(27.96,13.55) U19.25
  BOTTOM w0.2: v1(10.26,6.4) 10.99,7.13 10.99,7.33 12.47,8.8 15.05,8.8 19.8,13.55 v1(27.96,13.55)
LCD_EN: length 31.4
  TOP w0.3: v1(21.71,15.95) 23.41,15.95 27.09,12.27 27.09,10.25
  BOTTOM w0.3: J1.8 4.1,18.58 arc(7.25,16.48) 10.96,15.74 21.19,15.74 arc(21.47,15.79) v1(21.71,15.95)
LCD_RS: length 36.3
  TOP w0.3: 23.89,10.25 23.89,11.08 arc(23.74,11.85) 23.3,12.51 22.42,13.4 arc(21.63,13.92) v1(20.71,14.1)
  BOTTOM w0.3: v1(20.71,14.1) 20.53,14.28 arc(19.86,14.73) 19.07,14.89 6.34,14.89 arc(4.8,15.19) 3.5,16.06 2.33,17.23 arc(1.92,17.51) 1.43,17.6 arc(0.95,17.7) 0.54,17.97 arc(-0.15,19) -0.39,20.22 -0.39,23.69 arc(-0.18,24.76) 0.43,25.68 J1.6
LCD_RW: length 33.9
  TOP w0.3: 26.29,10.25 26.29,10.86 arc(26.18,11.43) 25.86,11.91 24.39,13.38 arc(22.81,14.43) v1(20.96,14.8)
  BOTTOM w0.3: v1(20.96,14.8) 20.78,14.98 arc(20.41,15.23) 19.98,15.31 9.58,15.31 arc(6.57,15.91) 4.02,17.62 1.72,19.92 arc(1.51,20.06) 1.27,20.1 arc(1.03,20.15) 0.82,20.29 0.59,20.53 arc(0.32,20.93) 0.22,21.41 0.22,22.19 arc(0.36,22.87) 0.74,23.44 J1.7
LD_GRN_CHRG: length 1.5
  TOP w0.2: R111.2 D25.2
LD_RD_CHRG: length 1.6
  TOP w0.2: D26.2 1.36,-8.24 arc(1.37,-8.2) 1.39,-8.17 arc(1.41,-8.14) 1.42,-8.1 R112.2
P5.5_FANCTRL: length 14.2
  TOP w0.2: Q1.1 17.59,5.82 v1(17.82,6.05) ; v1(17.37,7.27) 17.19,7.45 R98.2 16.79,8.84 20.66,12.7 21.86,12.7 22.29,12.27 22.29,10.25
  BOTTOM w0.2: v1(17.82,6.05) 17.82,6.83 v1(17.37,7.27)
P23_MAGSENSOR: length 20.5
  TOP w0.2: R81.1 42.5,29.41 J3.2 41.35,26.45 34.11,26.45 33.01,25.35 33.01,21.9 31.05,19.95 U19.33
PCF85063BTL_CE: length 3.5
  TOP w0.2: v1(31.46,17.81) 31.11,17.81 30.84,17.55 U19.30
  BOTTOM w0.2: v1(31.46,17.81) 32.17,17.81 32.28,17.7 U17.6
PCF85063BTL_SCL: length 3.7
  TOP w0.2: U19.32 31.19,19.15 v1(31.92,18.42)
  BOTTOM w0.2: U17.7 32.87,18.24 32.1,18.24 v1(31.92,18.42)
PCF85063BTL_SDIO: length 3.7
  TOP w0.2: U19.31 v1(30.95,18.35)
  BOTTOM w0.2: v1(30.95,18.35) 31.55,18.95 32.28,18.95 32.53,18.7 U17.8
RTC_XTAL1: length 3.3
  BOTTOM w0.2: U17.1 35.81,20.98 35.36,21.43 35.36,22.43 Y1.2
RTC_XTAL2: length 3
  BOTTOM w0.2: U17.2 36.81,19.2 37.08,19.48 37.08,20.7 Y1.1
STAT1: length 5.7
  TOP w0.2: U28.3 4.44,-5.93 4.41,-5.91 4.2,-5.91 arc(3.91,-5.85) 3.66,-5.68 3.38,-5.4 arc(3.31,-5.36) 3.24,-5.34 1.92,-5.34 arc(1.85,-5.34) 1.79,-5.35 1.55,-5.39 arc(1.25,-5.49) 1,-5.68 0.77,-5.91 arc(0.7,-5.95) 0.63,-5.96 arc(0.49,-5.99) 0.37,-6.07 0.06,-6.38 R111.1
STAT2: length 6
  TOP w0.2: U28.5 5.87,-7.38 arc(5.72,-7.41) 5.6,-7.49 arc(5.47,-7.58) 5.32,-7.61 4.75,-7.61 arc(4.63,-7.58) 4.52,-7.51 4.51,-7.51 3.72,-6.72 arc(3.58,-6.52) 3.53,-6.28 arc(3.49,-6.04) 3.35,-5.84 3.3,-5.79 arc(3.17,-5.7) 3.02,-5.67 2.61,-5.67 arc(2.08,-5.78) 1.63,-6.08 1.42,-6.29 R112.1
STC_IOEXPDR_SCL: length 26.3
  TOP w0.2: R106.1 31.4,15.8 31.82,15.39 31.82,15.31 v1(32.71,14.41) ; U26.47 41.46,13.87 41.12,13.53 37.94,13.53 v1(37.06,14.41) ; v1(21.26,12.15) 20.69,11.59 20.69,10.25
  BOTTOM w0.2: v1(37.06,14.41) 33.25,14.41 33.24,14.41 v1(32.71,14.41) ; v1(32.71,14.4) 31.11,12.8 21.91,12.8 v1(21.26,12.15)
STC_IOEXPDR_SDA: length 26.8
  TOP w0.2: U26.48 41.06,15.15 41.41,15.5 v1(41.41,15.7) ; U19.6 20.75,15.95 21.32,16.52 v1(27.26,16.52) ; v1(31.38,16.52) R107.1
  BOTTOM w0.2: v1(41.41,15.7) 41.41,16.23 41.33,16.31 41.33,16.32 41.13,16.52 39.98,16.52 39.6,16.14 31.75,16.14 v1(31.38,16.52) 31,16.14 27.64,16.14 v1(27.26,16.52)
STC_RXD: length 23.6
  TOP w0.2: v1(23.86,3.15) 23.86,5.91 23.41,6.35 23.41,8.21 24.69,9.5 24.69,10.25
  BOTTOM w0.2: v1(23.86,3.15) 12.04,3.15 arc(10.76,2.9) 9.68,2.18 J13.1
STC_TXD: length 20.6
  TOP w0.2: 25.49,10.25 v1(25.49,8.89)
  BOTTOM w0.2: J13.2 10.32,5.35 arc(10.38,5.39) 10.46,5.41 22.56,5.41 arc(22.64,5.42) 22.7,5.47 25.27,8.04 arc(25.44,8.28) 25.49,8.57 v1(25.49,8.89)
TEMPERATURE: length 3.1
  TOP w0.2: R104.1 18.31,8.11 18.93,8.72 19.12,8.72 19.89,9.5 19.89,10.25
V_5V_BEFORE_R: length 3
  TOP w0.3: R90.1 13.49,18.3 U20.3
VMAIN_6V: length 27.9
  TOP w0.127: 42.78,-10.6 J6.3 ; J6.3 43.96,-12.77 ; J6.3 43.96,-8.42 ; J10.1 16.26,2.14 ; J10.1 17.2,1.2 ; J10.1 15.32,1.2 ; J10.1 16.26,0.26
  TOP w0.3: C148.1 14.42,1.9 C150.1 C153.1 C152.1 C178.1 14.42,10.03 C179.1 C154.1 14.46,10.87 C155.1 C180.1 14.46,13.68 13.48,14.66 U20.1
  TOP w0.6: R124.1 14.4,1.13 C148.1 15.96,1.5 J10.1
N5281104: length 2.9
  TOP w0.2: R105.1 41.87,17 42.28,16.59 42.28,16.13 42.29,16.12 42.29,15.68 42.28,15.67 42.28,15.52 41.86,15.1 U26.46
N5281708: length 9.9
  TOP w0.2: J16.1 50.43,16.76 arc(49.06,16.49) 47.9,15.71 45.33,13.14 arc(45.24,13) 45.21,12.84 arc(45.17,12.67) 45.08,12.53 44.88,12.33 arc(44.52,12.09) 44.09,12 U26.38
N5281710: length 7.2
  TOP w0.2: U26.39 44.18,12.4 arc(44.4,12.45) 44.59,12.57 44.82,12.8 arc(44.86,12.87) 44.88,12.95 arc(44.92,13.14) 45.02,13.3 46.58,14.85 arc(47.19,15.77) 47.41,16.85 J16.2
N5281712: length 13.3
  TOP w0.2: U26.40 44.22,12.8 arc(44.35,12.83) 44.45,12.9 arc(44.53,13.01) 44.55,13.14 44.55,13.15 arc(44.58,13.28) 44.66,13.4 44.96,13.7 arc(45.25,14.15) 45.36,14.67 45.36,18.04 arc(45.45,18.51) 45.72,18.91 arc(46.11,19.17) 46.58,19.26 50.1,19.26 arc(50.14,19.27) 50.18,19.3 J16.3
N5281714: length 10.7
  TOP w0.2: U26.41 43.45,13.2 43.16,13.5 43.16,13.7 43.58,14.11 43.58,14.5 43.62,14.55 43.62,18.51 45.68,20.57 J16.4
N5281716: length 13.5
  TOP w0.2: U26.42 43.9,14.31 arc(43.92,14.36) 43.95,14.41 43.95,16 arc(44.24,17.48) 45.07,18.73 45.88,19.53 arc(45.94,19.58) 46.02,19.59 48.86,19.59 arc(48.99,19.62) 49.1,19.69 arc(49.13,19.73) 49.14,19.77 arc(49.14,19.81) 49.17,19.85 50.63,21.31 arc(51.22,21.7) J16.5
N5281718: length 10.7
  TOP w0.2: J16.6 47.03,23.11 arc(46.69,23.04) 46.39,22.84 44.16,20.6 arc(43.52,19.65) 43.29,18.52 43.29,15.08 arc(43.26,14.92) 43.18,14.79 arc(43.09,14.67) 43.06,14.51 U26.43 43.07,14.45
N5281720: length 17.2
  TOP w0.2: J16.7 46.11,24.38 42.97,21.24 42.97,15.21 42.66,14.9 U26.44
N5281722: length 13.8
  TOP w0.2: U26.45 42.26,15 42.64,15.38 42.64,21.63 46.66,25.65 J16.8
N5281756: length 9.6
  TOP w0.2: J14.1 33.71,17.1 33.79,17.02 33.79,16.58 33.71,16.51 33.71,14.65 36.36,12 U26.5
N5281758: length 13
  TOP w0.2: U26.4 36.5,12.4 34.98,13.92 J14.2
N5281760: length 0.6
  TOP w0.2: U26.3 36.56,12.8 36.43,12.94
N5281762: length 14
  TOP w0.2: U26.2 36.95,13.27 36.5,13.27 35.96,13.81 35.96,16.85 37.06,17.95 37.06,17.99 v1(37.54,18.47) ; J14.4 38.5,24.25 38.8,23.95 v1(38.8,22.45)
  BOTTOM w0.2: v1(37.54,18.47) 37.54,19.24 38.8,20.5 v1(38.8,22.45)
N5281764: length 7.6
  TOP w0.2: 38.79,19.75 38.79,18.94 37.01,17.16 37.01,15.71 36.33,15.02 36.33,13.98 36.7,13.6 U26.1
N5281766: length 11.3
  TOP w0.2: J14.6 40.06,19.57 39.77,19.28 39.77,18.16 39.68,18.07 38.71,18.07 37.86,17.22 U26.56
N5281768: length 7.5
  TOP w0.2: J14.7 40.71,19.75 40.1,19.14 40.1,18.02 39.81,17.74 38.84,17.74 38.26,17.15 U26.55
N5281770: length 13
  TOP w0.2: J14.8 42.6,22.53 42.31,22.23 42.31,18.16 41.56,17.41 38.98,17.41 38.67,17.1 38.67,16.09 38.66,16.08 U26.54
N5281960: length 14.4
  TOP w0.2: J15.1 31.48,-2.84 arc(31.83,-2.77) 32.12,-2.58 33.06,-1.64 arc(33.95,-0.31) 34.26,1.26 34.26,5.68 arc(34.41,6.44) 34.84,7.08 36.24,8.48 arc(36.6,8.72) U26.13
N5281966: length 18.5
  TOP w0.2: U26.12 36.68,9.2 arc(36.51,9.17) 36.37,9.07 34,6.7 arc(33.89,6.55) 33.86,6.37 33.86,0.9 arc(33.67,-0.05) 33.13,-0.85 arc(32.33,-1.38) 31.39,-1.57 J15.2
N5281972: length 13
  TOP w0.2: J15.3 31.48,-0.3 arc(31.83,-0.23) 32.12,-0.04 32.85,0.69 arc(33.32,1.4) 33.49,2.23 33.49,6.35 arc(33.56,6.7) 33.76,6.99 36.09,9.32 arc(36.4,9.53) 36.77,9.6 U26.11
N5281978: length 17
  TOP w0.2: U26.10 36.77,10 arc(36.21,9.89) 35.73,9.57 33.33,7.18 arc(33.21,6.99) 33.16,6.77 33.16,2.25 arc(33.07,1.76) 32.79,1.34 arc(32.37,1.07) 31.88,0.97 26.61,0.97
N5281984: length 11.1
  TOP w0.2: J15.5 31.14,2.24 32.52,3.61 arc(32.75,3.97) 32.84,4.39 32.84,7.07 arc(32.86,7.22) 32.95,7.34 35.71,10.1 arc(36.04,10.33) 36.43,10.4 U26.9
N5281990: length 13.4
  TOP w0.2: J15.6 27.36,3.51 28.48,4.63 v1(29.13,4.63) ; U26.8 36.02,10.8 arc(35.36,10.67) v1(34.81,10.3)
  BOTTOM w0.2: v1(34.81,10.3) v1(29.13,4.63)
N5281996: length 9.9
  TOP w0.2: J15.7 31.11,6.08 arc(31.35,7.29) 32.03,8.31 34.32,10.6 arc(34.99,11.05) 35.77,11.2 U26.7
N5282002: length 12.4
  TOP w0.2: U26.6 35.03,11.6 arc(34.87,11.57) 34.74,11.49 31.21,7.95 arc(29.1,6.54) J15.8
N5282607: length 3.8
  TOP w0.2: U26.37 44.88,11.6 arc(45.56,11.74) 46.14,12.13 46.39,12.38 arc(46.69,12.58) 47.03,12.65 J17.1
N5282609: length 8.1
  TOP w0.2: J17.2 50.31,11.38 arc(50.19,11.36) 50.09,11.29 arc(50,11.23) 49.88,11.2 U26.36
N5282611: length 3.7
  TOP w0.2: U26.35 46.22,10.8 arc(46.68,10.71) 47.06,10.46 J17.3
N5282613: length 8.8
  TOP w0.2: J17.4 46.41,8.84 arc(46.13,8.89) 45.9,9.05 45.86,9.08 arc(45.73,9.28) 45.68,9.52 arc(45.63,9.76) 45.5,9.96 45.47,9.99 arc(45.02,10.3) 44.48,10.4 U26.34
N5282615: length 4.8
  TOP w0.2: U26.33 44.7,10 arc(44.95,9.95) 45.16,9.81 arc(45.31,9.6) 45.36,9.35 45.36,9.25 arc(45.42,8.9) 45.62,8.61 46.13,8.1 arc(46.72,7.71) J17.5
N5282617: length 10.6
  TOP w0.2: U26.32 44.74,9.6 arc(44.85,9.58) 44.94,9.52 arc(45.01,9.42) 45.03,9.31 45.03,7.72 arc(45.14,7.18) 45.45,6.72 arc(45.91,6.41) 46.46,6.3 J17.6
N5282619: length 6.4
  TOP w0.2: U26.31 44.58,9.2 arc(44.62,9.19) 44.66,9.17 arc(44.69,9.13) 44.7,9.08 44.7,7.07 arc(44.72,6.99) 44.76,6.93 46.13,5.56 arc(46.72,5.17) J17.7
N5282621: length 13.7
  TOP w0.2: J17.8 51.53,3.76 arc(51.19,3.69) 50.89,3.49 50.52,3.11 arc(49.8,2.64) 48.96,2.47 46.83,2.47 arc(46.65,2.51) 46.5,2.61 45.68,3.43 arc(45.5,3.7) 45.43,4.03 45.43,5.25 arc(45.42,5.32) 45.37,5.39 43.66,7.1 arc(43.6,7.19) 43.58,7.3 43.58,7.71 arc(43.55,7.87) 43.46,8.01 arc(43.37,8.14) 43.33,8.3 43.33,8.6 arc(43.35,8.68) 43.39,8.74 arc(43.46,8.79) 43.54,8.8 U26.30
N5282705: length 8.6
  TOP w0.2: v1(41.73,4.2) 41.44,4.2 arc(41.18,4.26) 40.96,4.4 40.71,4.65 arc(40.38,5.15) 40.26,5.74 U26.21 ; J18.1 43.59,1.37 43.59,3.37 v1(43.46,3.5)
  BOTTOM w0.2: v1(41.73,4.2) 42.76,4.2 v1(43.46,3.5)
N5282707: length 11.8
  TOP w0.2: U26.20 39.86,4.89 arc(39.91,4.62) v1(40.06,4.4) ; v1(41.4,-2.2) 41.4,-2.22 J18.2
  BOTTOM w0.2: v1(41.4,-2.2) 40.06,-0.85 v1(40.06,4.4)
N5282709: length 6.8
  TOP w0.2: J18.3 41.16,1.63 arc(41.1,1.97) 40.9,2.27 40.31,2.86 arc(39.68,3.8) 39.46,4.91 U26.19
N5282711: length 11
  TOP w0.2: U26.18 39.06,3.98 arc(39.17,3.43) 39.48,2.97 arc(39.79,2.51) 39.89,1.96 39.89,-3.25
N5282713: length 6.3
  TOP w0.2: J18.5 38.62,2.93 arc(38.63,2.98) 38.66,3.01 U26.17
N5282715: length 11.1
  TOP w0.2: U26.16 38.26,7.11 arc(38.18,6.7) 37.94,6.35 37.81,6.21 arc(37.47,5.71) 37.35,5.12 J18.6
N5282717: length 6.9
  TOP w0.2: J18.7 36.08,4.08 arc(36.28,5.06) 36.83,5.88 37.4,6.45 arc(37.74,6.96) U26.15
N5282719: length 12.6
  TOP w0.2: U26.14 36.86,8.4 arc(36.72,8.37) 36.59,8.29 35.76,7.46 arc(35.06,6.41) 34.81,5.18 J18.8
N5282803: length 9.9
  TOP w0.2: v1(46.86,3) 45.83,4.03 arc(45.78,4.11) 45.76,4.2 45.76,5.28 arc(45.73,5.45) 45.63,5.6 44.29,6.94 arc(44,7.36) 43.9,7.86 U26.29 ; v1(46.86,1.1) 47.41,0.55 J19.1
  BOTTOM w0.2: v1(46.86,1.1) v1(46.86,3)
N5282805: length 13.9
  TOP w0.2: U26.28 43.06,7.4 arc(43.09,7.25) 43.17,7.13 44.99,5.31 arc(45.08,5.18) 45.11,5.03 45.11,3.95 arc(45.18,3.57) 45.4,3.25 46.27,2.37 arc(46.53,2.2) 46.83,2.14 47.91,2.14 arc(49.21,1.89) 50.32,1.15 51.22,0.25 arc(51.73,-0.52) J19.2
N5282807: length 13.2
  TOP w0.2: U26.27 42.66,7.1 44.78,4.98 44.78,-1.79 45.68,-2.69 J19.3
N5282809: length 19.3
  TOP w0.2: U26.26 42.26,7.21 arc(42.29,7.05) 42.39,6.91 43.33,5.97 arc(43.43,5.82) 43.46,5.64 43.46,4.39 arc(43.44,4.27) 43.37,4.17 43.08,3.87 arc(42.97,3.71) 42.93,3.51 42.93,3.13 arc(42.91,3.05) 42.87,2.99 arc(42.82,2.92) 42.8,2.84 42.8,-0.33 arc(42.81,-0.39) 42.85,-0.43 arc(42.89,-0.46) 42.94,-0.47 43.01,-0.47 arc(43.12,-0.5) 43.22,-0.56 44.36,-1.7 arc(44.43,-1.8) 44.45,-1.92 44.45,-1.93 44.45,-2.11 arc(44.49,-2.28) 44.58,-2.42 45.41,-3.24 arc(46.2,-3.78) 47.14,-3.96 51.91,-3.96
N5282811: length 15.9
  TOP w0.2: U26.25 41.86,7.48 arc(41.96,6.95) 42.26,6.51 43.05,5.72 arc(43.11,5.62) 43.14,5.51 43.14,4.53 arc(43.11,4.4) 43.04,4.3 42.84,4.1 arc(42.66,3.83) 42.6,3.52 42.6,3.27 arc(42.58,3.19) 42.54,3.12 arc(42.49,3.05) 42.48,2.97 42.48,-0.38 arc(42.51,-0.54) 42.6,-0.68 42.63,-0.71 arc(42.73,-0.78) 42.86,-0.8 arc(42.98,-0.83) 43.09,-0.9 44.08,-1.88 arc(44.11,-1.93) 44.12,-1.99 44.12,-2.06 44.13,-2.06 44.13,-2.14 arc(44.23,-2.66) 44.52,-3.09 46.39,-4.97 arc(46.69,-5.16) 47.03,-5.23 J19.5
N5282813: length 21.7
  TOP w0.2: J19.6 46.98,-6.5 arc(45.76,-6.26) 44.73,-5.57 arc(44.04,-4.53) 43.8,-3.31 43.8,-3.26 arc(43.58,-2.16) 42.96,-1.22 arc(42.85,-1.15) 42.72,-1.13 arc(42.6,-1.1) 42.49,-1.03 42.37,-0.91 arc(42.21,-0.67) 42.15,-0.38 42.15,3.12 arc(42.16,3.19) 42.2,3.25 arc(42.25,3.31) 42.26,3.38 42.26,5.44 arc(42.16,5.96) 41.86,6.4 arc(41.56,6.85) 41.46,7.37 U26.24
N5282815: length 19.1
  TOP w0.2: v1(41.26,6.1) 41.26,6.36 arc(41.23,6.49) 41.16,6.6 arc(41.09,6.71) 41.06,6.84 U26.23 ; v1(45.36,-7.8) 47.38,-7.8 J19.7
  BOTTOM w0.2: v1(41.26,6.1) 40.79,5.63 arc(40.67,5.45) 40.63,5.24 40.63,4.58 arc(41.24,1.49) 42.99,-1.13 43.84,-1.98 arc(44.96,-3.66) 45.36,-5.65 v1(45.36,-7.8)
N5282817: length 21.6
  TOP w0.2: v1(49.86,-7.3) 49.86,-7.74 51.16,-9.04 J19.8 ; U26.22 40.66,6.41 arc(40.79,5.76) v1(41.16,5.2)
  BOTTOM w0.2: v1(49.86,-7.3) 49.86,-4.9 41.16,3.8 v1(41.16,5.2)
N5297541: length 8.2
  TOP w0.3: U28.6 6.62,-7.76 arc(6.57,-7.97) 6.45,-8.15 C140.1 ; C140.1 6.44,-8.32 arc(6.59,-8.34) 6.71,-8.42 6.81,-8.52 arc(6.96,-8.75) 7.01,-9.02 7.01,-9.88 arc(6.98,-10.06) 6.87,-10.21 arc(6.72,-10.31) 6.54,-10.35 5.62,-10.35 arc(4.77,-10.18) 4.04,-9.69 3.73,-9.38 arc(3.53,-9.25) R119.2 ; C140.1 5.46,-8.32 R109.2
N5297885: length 3.9
  TOP w0.25: U28.16 6.11,-3.12 arc(6.17,-2.79) 6.36,-2.52 C143.1 6.63,-2.15 6.63,-2.11 6.87,-1.87 D27.3
N5297889: length 19.9
  TOP w0.25: v1(7.62,-3.1) 7.62,-2.69 arc(7.59,-2.53) 7.5,-2.39 arc(7.36,-2.3) 7.19,-2.27 C143.2 ; v1(7.62,-3.1) 7.37,-3.35 arc(7.19,-3.63) 7.12,-3.95 U28.14 ; v1(7.62,-3.1) 7.63,-3.1
  TOP w0.4: Q31.3 11.6,-8.23 10.94,-7.57 10.93,-7.57 v1(10.48,-7.13)
  TOP w0.6: Q31.3 12.26,-8.23 13.66,-6.83 14.1,-6.83 ; L1.1 19.45,-6.99 Q31.7
  TOP w0.8: Q31.7 15.98,-6.99 ; Q31.8 16.27,-5.69
  TOP w0.9: Q31.8 Q31.7
  BOTTOM w0.4: v1(10.48,-7.13) 7.71,-4.36 7.71,-3.29 7.62,-3.2 v1(7.62,-3.1)
N5298100: length 6.9
  TOP w0.127: v1(4.97,-7.07) 5.32,-7.07 arc(5.46,-7.05) 5.58,-6.97 arc(5.73,-6.86) 5.92,-6.82 6.69,-6.82 arc(6.81,-6.85) 6.92,-6.92 7.03,-7.03 arc(7.1,-7.13) 7.12,-7.25 U28.7 ; v1(3.52,-7.27) 3.54,-7.27 4.18,-7.91 R110.2
  TOP w0.3: R109.1 5.45,-9.26 5,-8.81 arc(4.98,-8.72) 4.92,-8.63 4.21,-7.92 R110.2
  BOTTOM w0.127: v1(4.97,-7.07) 4,-7.07 arc(3.87,-7.1) 3.76,-7.17 3.76,-7.17 arc(3.65,-7.25) v1(3.52,-7.27)
N5300450: length 3.5
  TOP w0.2: U28.12 9.01,-4.91 arc(9.19,-4.88) 9.34,-4.78 9.34,-4.78 arc(9.44,-4.63) 9.47,-4.45 C149.1 9.47,-3.46 arc(9.52,-3.22) 9.66,-3.01 arc(9.87,-2.87) 10.12,-2.82 D27.1
N5300470: length 16.5
  TOP w0.15: C142.1 9.95,-6.09 arc(9.9,-6.34) 9.76,-6.55 arc(9.54,-6.69) 9.29,-6.74 8.21,-6.74 arc(8.14,-6.73) 8.09,-6.69 8.04,-6.64 8.04,-6.28 arc(8.05,-6.21) 8.09,-6.16 8.32,-5.93 U28.10
  TOP w0.25: C142.1 10.77,-5.33 11.06,-5.21 12.63,-5.21 12.65,-5.23 14.28,-5.23 14.88,-4.63 15.9,-4.63 R116.2
  TOP w0.6: R116.2 19,-4.92 L1.2
N5300474: length 15.3
  TOP w0.2: C142.2 9.85,-4.93 arc(9.77,-4.95) 9.69,-5 9.47,-5.21 9.47,-5.98 arc(9.44,-6.16) 9.34,-6.3 arc(9.19,-6.4) 9.01,-6.44 U28.9
  TOP w0.25: 14.65,-3.56 14.65,-3.56 14.65,-4.29 14.09,-4.85 12.81,-4.85 12.79,-4.83 10.97,-4.83 10.93,-4.86 10.76,-4.93 C142.2
  TOP w0.3: R116.1 14.76,-3.04 arc(14.68,-3.17) 14.65,-3.31 14.65,-3.56 ; R124.2 13.87,-0.82 13.81,-0.88 13.07,-0.88 ; C151.1 13.07,-0.88 ; 13.07,-0.88 arc(12.96,-1.04) 12.92,-1.23 arc(12.97,-1.52) 13.14,-1.76 13.52,-2.15 R122.2
  TOP w0.6: R124.2 14.89,-0.82 R116.1
N5300499: length 5.5
  TOP w0.3: v1(10.71,-6.43) 11.25,-6.96 11.93,-6.96 ; U28.13 8.26,-3.98 v1(8.38,-4.09)
  BOTTOM w0.3: v1(10.71,-6.43) 8.79,-4.51 8.79,-4.5 v1(8.38,-4.09)
N5300503: length 9.9
  TOP w0.3: Q31.4 11.76,-9.5 11.52,-9.42 11.07,-8.97 11.05,-8.97 v1(10.86,-8.92) ; U28.15 6.62,-3.49 arc(6.65,-3.32) v1(6.74,-3.18)
  BOTTOM w0.3: v1(6.74,-3.18) 7.15,-3.59 7.15,-4.62 9.76,-7.22 9.76,-8.4 10.27,-8.92 v1(10.86,-8.92)
N5300584: length 11.6
  TOP w0.3: U28.8 7.63,-7.51 arc(7.65,-7.62) 7.72,-7.72 7.91,-7.91 arc(8.21,-8.11) 8.57,-8.18 8.58,-8.17 v1(10.61,-8.17) ; v1(11.36,-4.24) 11.36,-4.07 arc(11.4,-3.85) 11.53,-3.66 11.58,-3.61 arc(11.72,-3.52) 11.88,-3.49 R115.2 12.07,-3.47 R122.1 12.07,-1.13 arc(12.1,-0.99) C151.2
  BOTTOM w0.3: v1(11.36,-4.24) 11.36,-7.43 arc(11.14,-7.96) v1(10.61,-8.17)
N5302120: length 5
  TOP w0.25: v1(2.97,-6.2) 2.56,-6.2 arc(2.47,-6.22) 2.39,-6.28 R113.2 ; v1(4.06,-4.77) C139.1
  TOP w0.3: U28.1 5.17,-4.7 arc(5.13,-4.5) 5.02,-4.33 4.95,-4.27 arc(4.72,-4.11) 4.44,-4.06 C139.1
  BOTTOM w0.25: v1(4.06,-4.77) 4.06,-5.05 arc(4.01,-5.31) 3.86,-5.53 3.66,-5.73 arc(3.57,-5.79) 3.47,-5.81 arc(3.37,-5.83) 3.28,-5.89 v1(2.97,-6.2)
N5302799: length 22.9
  TOP w0.3: R113.1 2.32,-9.45 2.46,-9.6 arc(2.8,-9.82) 3.2,-9.9 3.45,-9.9 arc(3.63,-9.94) 3.77,-10.03 6.22,-12.48 arc(6.44,-12.63) 6.7,-12.68 6.99,-12.68
  TOP w0.5: 16.28,-9.5 17.19,-9.5 ; Q31.6 16.4,-8.21
  TOP w0.6: U30.3 7.59,-13.43 9.46,-11.56 C145.1 10.45,-9.55 11.06,-10.16 13.76,-10.16 14.37,-9.55
  TOP w1: Q31.6 Q31.5
  TOP w1.4: 6.99,-12.68 U30.3 ; 17.19,-9.5 Q31.5
N5307205: length 6.2
  TOP w0.2: U28.2 4.52,-5.42 arc(3.91,-5.3) 3.4,-4.96 3.28,-4.83 arc(3.04,-4.48) 2.96,-4.06 arc(2.87,-3.65) 2.64,-3.29 2.39,-3.05 R117.1 R118.2
N5307428: length 10.3
  TOP w0.25: RT1.2 2.02,-12.72 arc(2.23,-12.67) 2.41,-12.55 arc(2.6,-12.43) 2.81,-12.39 R120.2 3.3,-11.71 3.29,-11.7 R119.1 2.97,-10.67 arc(2.68,-10.62) 2.44,-10.45 2.39,-10.4 arc(2.36,-10.36) v1(2.35,-10.3) ; v1(4.19,-6.44) 4.4,-6.44 4.41,-6.44 4.87,-6.44 4.87,-6.44 U28.4
  BOTTOM w0.25: v1(2.35,-10.3) 2.35,-8.6 arc(2.53,-7.69) 3.04,-6.91 arc(3.57,-6.56) v1(4.19,-6.44)
N5310551: length 2.4
  TOP w0.3: R121.2 10.46,-14.86 10.17,-14.56 C146.1
N5327580: length 1.4
  TOP w0.2: U26.53 39.06,15.1 39.18,15.21 R123.2
N5329171: length 34.2
  TOP w0.127: U19.26 31.28,14.35 32.03,13.6 v1(33.71,13.6) ; J26.1 49.81,31.15 v1(50.56,30.4)
  BOTTOM w0.127: v1(50.56,30.4) 50.56,23.4 40.76,13.6 v1(33.71,13.6)
N5329180: length 35.3
  TOP w0.127: v1(31.51,14.8) 31.16,15.15 U19.27
  BOTTOM w0.127: J26.2 50.06,32.64 50.06,30.45 42.76,23.15 42.76,16 41.37,14.61 39.44,14.61 39.07,14.98 32.54,14.98 32.36,14.8 v1(31.51,14.8)
N5329189: length 40.2
  TOP w0.127: v1(29.91,22.26) 28.28,20.63 28.28,20.62 27.01,19.34 27.01,17.65 28.38,16.28 28.51,16.28 28.84,15.95 U19.28
  BOTTOM w0.127: v1(29.91,22.26) 31.11,22.26 48.71,39.85 49.41,39.85 50.11,39.15 50.11,37.33 J26.3
N5329196: length 33.9
  TOP w0.127: v1(30.11,21.2) 29.41,21.2 27.26,19.05 27.26,17.85 28.36,16.75 U19.29
  BOTTOM w0.127: v1(30.11,21.2) 31.44,21.2 J26.4

## Copper pours and planes (outline as drawn; the poured copper is in the pictures)
VCC on TOP: 30.65,26.03 30.65,25.72 30.72,25.61 30.71,23.94 30.93,23.75 32.21,23.76 32.35,23.93 32.35,25.94 32.24,26.04
VCC on TOP: 38.97,17.21 38.97,16.71 40.55,14.93 40.81,14.93 40.86,15.98 41.3,16.39 40.32,17.21
VCC on TOP: 21.57,6.75 15.73,6.71 15.49,7.01 15.49,16.97 15.27,17.16 9.19,17.14 8.99,17.3 4.15,21.44 4.16,30.65 3.96,30.83 0.34,30.83 0.35,31.97 4.05,31.96 4.16,32.1 5.51,32.1 5.74,31.86 5.74,26.89 6.6,25.42 8.48,24.37 9.85,21.2 14.38,21.2 17.09,19.74 17.08,17.45 16.8,17.18 16.53,17.18 16.28,16.97 16.28,7.96 16.46,7.76 18.82,7.77 18.82,7.87 18.86,7.91 18.98,7.91 19.03,7.87 19.02,7.09 19.07,7.03 20.64,7.04 21.3,10.42 21.69,10.42 21.67,6.86
VIN_SOLAR on TOP: 5.11,-16.38 5.02,-16.48 5.03,-18.54 5.11,-18.62 18.12,-18.62 34.73,-15.21 34.8,-10.06 34.04,-9.19 31.71,-9.19 30.94,-13.21 24.22,-14.66 17.89,-15.78 9.88,-15.77 8.79,-16.37
0 on TOP: 7.58,-0.87 7.58,-1.55 7.65,-1.61 7.62,-4.83 10.62,-4.21 11.49,-1.55 11.72,-1.55 11.8,-1.47 12.35,-1.47 12.42,-1.55 14.34,-1.56 14.42,-1.63 14.47,-4.64 14.48,-5.34 11.48,-5.42 10.97,-6.83 7.72,-6.83 7.74,-8.29 7.73,-10.56 7.67,-10.62 5.01,-10.63 4.55,-11.1 4.57,-19.67 45.49,-19.67 45.49,-8.42 40.83,-3.77 27.07,-3.77 25,-1.69 20.01,-3.11 15.08,-0.74 15.08,4.1 12.07,4.1 11.1,-0.86 7.62,-0.82
0 on TOP: -0.94,-19.67 -0.94,40.9 54.06,40.9 54.06,-19.67 45.76,-19.67 45.76,-8.22 40.86,-3.41 27.07,-3.45 25.2,-1.6 20.85,-1.59 15.11,4.27 11.97,4.27 10.95,-0.71 7.5,-0.7 7.49,-1.55 7.39,-1.61 7.56,-4.91 10.7,-4.28 11.52,-1.63 14.28,-1.63 14.33,-1.68 14.33,-5.29 11.24,-5.26 10.75,-6.69 7.83,-6.66 7.06,-6.95 6.74,-7.93 6.74,-10.41 4.96,-10.43 4.39,-11.01 4.39,-19.67 ; 1 cut-out
0 on BOTTOM: 7.58,-0.87 9.13,-4.24 10.63,-4.21 11.48,-1.56 14.38,-1.57 14.41,-3.88 14.44,-4.97 11.33,-4.93 7.74,-8.48 7.72,-10.56 7.67,-10.62 5.01,-10.63 4.55,-11.1 4.57,-19.67 45.49,-19.67 45.49,-8.42 40.83,-3.77 27.07,-3.77 27.07,-3.77 25.57,-2.26 24.15,-0.83 19.96,-0.87 15.06,4.1 12.07,4.1 11.1,-0.86
0 on BOTTOM: -0.94,-19.67 -0.94,40.9 54.06,40.9 54.06,-19.67 45.76,-19.67 45.76,-8.22 40.86,-3.41 27.07,-3.45 24.34,-0.74 20,-0.72 15.22,4.16 11.95,4.16 10.95,-0.71 7.42,-0.7 9.08,-4.28 10.65,-4.27 11.52,-1.63 14.32,-1.63 14.33,-4.72 11.3,-4.73 9.43,-6.49 7.41,-8.43 7.4,-10.3 5.88,-10.26 5.7,-10.43 4.97,-10.43 4.39,-11.01 4.39,-19.67
V_5V_BEFORE_R on TOP: 9.92,19.95 9.92,17.91 10.06,17.77 15.09,17.78 15.47,18.43 14.91,20.07 10.02,20.06
VMAIN_6V on TOP: 14.28,15.18 14.28,-0.29 15.32,-0.29 15.32,15.18
VMAIN_6V on TOP: 43.13,-13.04 41.42,-11.33 36.67,-11.32 32.05,-6.16 25.33,-6.17 22.33,-2.98 20.29,-2.96 14.31,-0.15 14.28,13.75 14.15,13.86 9.71,13.85 12.98,17.02 15.23,17.02 15.35,16.92 15.41,3.73 20.91,-1.83 24.13,-1.83 26.68,-4.8 33.08,-4.81 37.85,-9.92 41.29,-9.93 43.14,-8.08 44.67,-8.08 45.17,-8.58 45.17,-12.78 44.91,-13.04
N5297889 on TOP: 13.63,-5.63 13.64,-6.91 13.82,-7.11 17.35,-7.1 17.35,-5.43 13.83,-5.43
N5302799 on TOP: 13.57,-8.3 13.57,-9.87 13.99,-10.34 17.43,-10.34 17.43,-7.81 13.95,-7.8
